# EAGLE board PAPR_PCB_v17 (EAGLE 9.7.0)
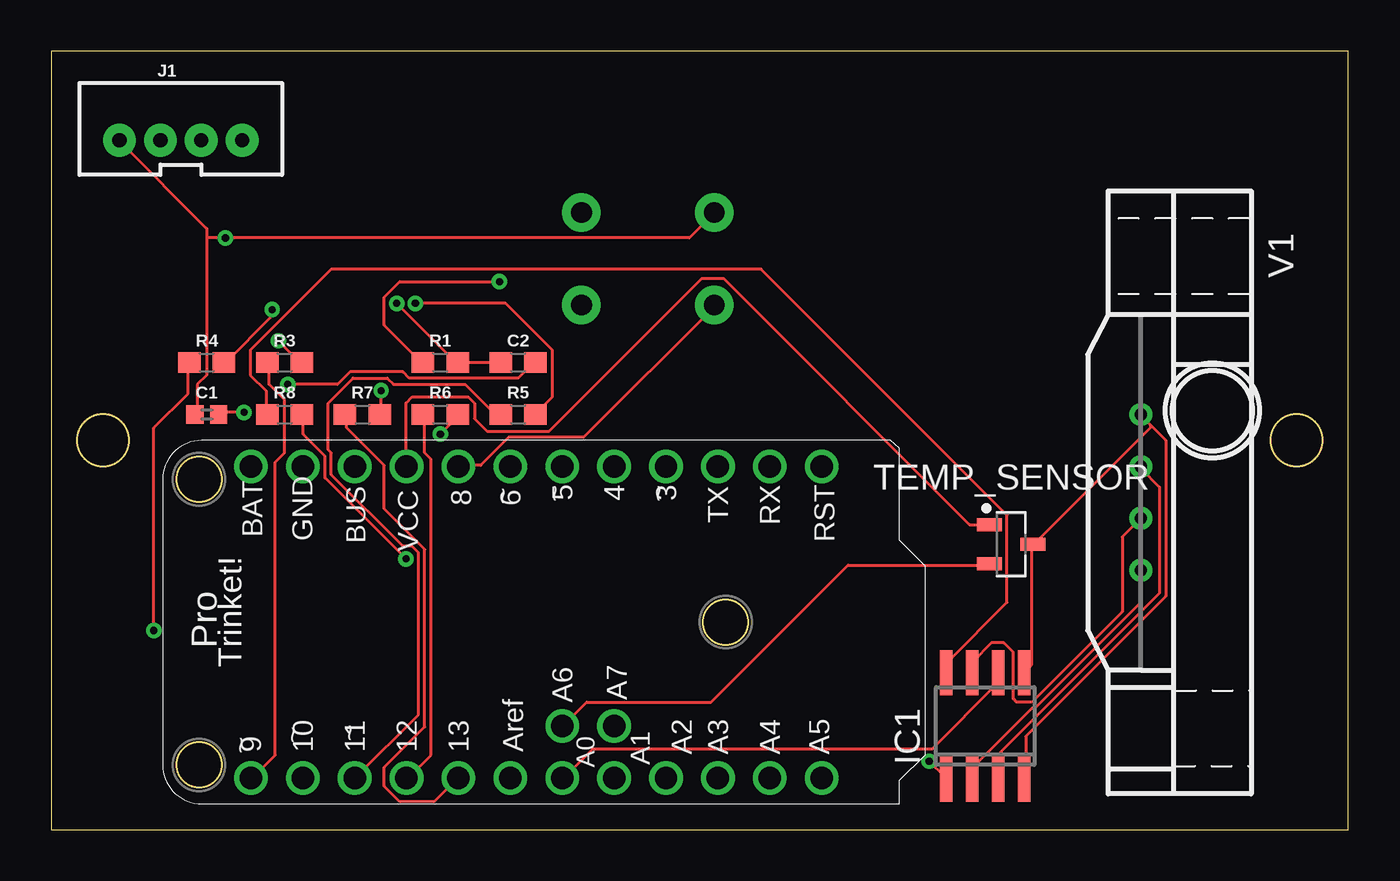
[diagram p0: board, top side]
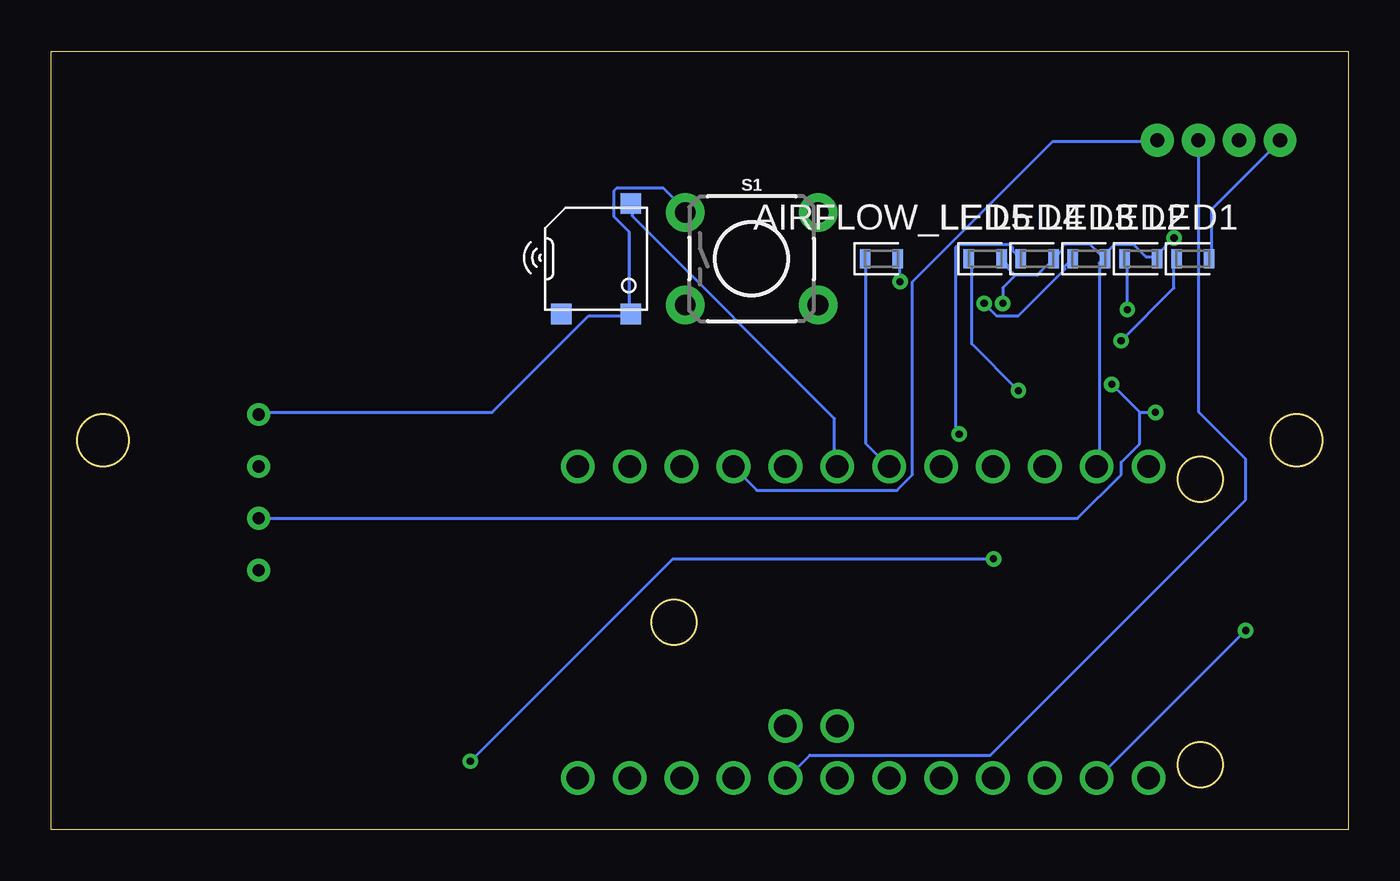
[diagram p1: board, bottom side, seen from below]

Size 63.5 x 38.1 mm. Coordinates in mm from the lower left corner, seen from the top.
Outline: 0,38.1 0,0 63.5,0 63.5,38.1 0,38.1
Outline: circle at 60.96,19.05 radius 1.27
Outline: circle at 2.54,19.05 radius 1.27
Outline: circle at 7.24,3.17 radius 1.1
Outline: circle at 7.24,17.14 radius 1.1
Outline: circle at 33.02,10.16 radius 1.1
Copper layers (1*16): Top 0.035mm / dielectric 1.5mm / Bottom 0.035mm
Design rules "default": minimum track width 6mil, minimum drill 0.35mm, track to track 6mil, track to pad 6mil, pad to pad 6mil, via to via 6mil, smd to smd 6mil, copper to edge 40mil, drill to drill 6mil, minimum pad ring 10mil, minimum via ring 8mil, stop-mask expansion 4mil, vias tented up to drill 0mil, thermal gap 10mil

## Footprints (pad centres in the part's own frame; a part is rotated, then mirrored left to right if it is on the bottom)
LEDC1608X39N_R = smd 0.512 x 0.912: 1 -0.8,0; 2 0.8,0
SMT-0540-S-R = smd 1 x 1: + 1.7,-2.7; - 1.7,2.7; M -1.7,-2.7
0402 = smd 0.85 x 0.9: 1 -0.58,0; 2 0.58,0
0603 = smd 1.1 x 1: 1 -0.85,0; 2 0.85,0
SO8 = smd 0.6 x 2.2: 1 -1.905,-2.6; 2 -0.635,-2.6; 3 0.635,-2.6; 4 1.905,-2.6; 5 1.905,2.6; 6 0.635,2.6; 7 -0.635,2.6; 8 -1.905,2.6
JST-4-PTH-VERT = drill 0.7 pad 1.6: 1 -3,-0.55; 2 -1,-0.55; 3 1,-0.55; 4 3,-0.55
LEDC1608X39N_G = smd 0.512 x 0.912: 1 -0.8,0; 2 0.8,0
TACTILE_SWITCH_PTH_6.0MM = drill 1.016 pad 1.88: 1 -3.251,2.261; 2 3.251,2.261; 3 -3.251,-2.261; 4 3.251,-2.261
SOT95P237X112-3N = smd 1.224 x 0.625: 1 -1.064,0.95; 2 -1.064,-0.95; 3 1.064,0
PROTRINKET = drill 1.1: 3 7.62,2.921; 4 7.62,5.461; 5 7.62,8.001; 6 7.62,10.541; 8 7.62,13.081; 9 -7.62,23.241; 10 -7.62,20.701; 11 -7.62,18.161; 12 -7.62,15.621; 13 -7.62,13.081; A0 -7.62,8.001; A1 -7.62,5.461; A2 -7.62,2.921; A3 -7.62,0.381; A4 -7.62,-2.159; A5 -7.62,-4.699; A6 -5.08,8.001; A7 -5.08,5.461; AREF -7.62,10.541; BAT+ 7.62,23.241; GND 7.62,20.701; RST 7.62,-4.699; RX 7.62,-2.159; TX 7.62,0.381; USB 7.62,18.161; VCC 7.62,15.621 | hole 2.2: -6.985,25.781; 6.985,25.781; 0,0
MPX2050GPV = drill 0.6: 1 -3.81,0; 2 -1.27,0; 3 1.27,0; 4 3.81,0

## Placement (x,y rotation side)
AIRFLOW_LED  LED_CHIP_RED-1608  [LEDC1608X39N_R]  22.86,27.94 0 bottom
ALERT_BUZZER  SMT-0540-S-R  [SMT-0540-S-R]  36.83,27.94 0 bottom
C1  0.1uF  [0402]  7.62,20.32 0 top
C2  10uF  [0603]  22.86,22.86 0 top
IC1  AD623R  [SO8]  45.72,5.08 0 top
J1  [JST-4-PTH-VERT]  6.35,34.29 0 top
LED1  LED_CHIP_RED-1608  [LEDC1608X39N_R]  7.62,27.94 0 bottom
LED2  LED_CHIP_RED-1608  [LEDC1608X39N_R]  10.16,27.94 0 bottom
LED3  LED_CHIP_GREEN-1608  [LEDC1608X39N_G]  12.7,27.94 0 bottom
LED4  LED_CHIP_GREEN-1608  [LEDC1608X39N_G]  15.24,27.94 0 bottom
LED5  LED_CHIP_GREEN-1608  [LEDC1608X39N_G]  17.78,27.94 0 bottom
R1  180  [0603]  19.05,22.86 0 top
R3  180  [0603]  11.43,22.86 0 top
R4  180  [0603]  7.62,22.86 0 top
R5  180  [0603]  22.86,20.32 0 top
R6  180  [0603]  19.05,20.32 0 top
R7  180  [0603]  15.24,20.32 0 top
R8  100  [0603]  11.43,20.32 0 top
S1  MOMENTARY-SWITCH-SPST-PTH-6.0MM  [TACTILE_SWITCH_PTH_6.0MM]  29.21,27.94 0 bottom
TEMP_SENSOR  MCP9700T-E/TTSOT-23  [SOT95P237X112-3N]  46.99,13.97 0 top
U$2  PRO_TRINKET  [PROTRINKET]  33.02,10.16 90 top
V1  MPX2050GPV  [MPX2050GPV]  53.34,16.51 270 top

## Library data of the parts
AIRFLOW_LED LED1 LED2 = Tutorial - Fusion 360; CATEGORY: Opto-Electronic; COLOR: Red; SUB-CATEGORY: LED
ALERT_BUZZER U$2 = adafruit
C1 = SparkFun-Capacitors; PROD_ID: CAP-12416
C2 = SparkFun-Capacitors; PROD_ID: CAP-11015
IC1 = analog-devices; MPN: AD623ARZ.; OC_FARNELL: 9426213; OC_NEWARK: 31M4186
J1 = SparkFun-Connectors; PROD_ID: CONN-13251
LED3-LED5 = Tutorial - Fusion 360; CATEGORY: Opto-Electronic; COLOR: Green; SUB-CATEGORY: LED
R1 R3-R7 = SparkFun-Resistors; PROD_ID: RES-08788
R8 = SparkFun-Resistors; PROD_ID: RES-12438
S1 = SparkFun-Switches; PROD_ID: SWCH-08441; SF_SKU: COM-00097
TEMP_SENSOR = Sensor; CATEGORY: Sensor; SUB-CATEGORY: Temperature
V1 = motorola-sensor-driver; MF: MOTOROLA; MPN: MPX2050GP; OC_FARNELL: 8814910; OC_NEWARK: 48F6767

## Nets
GND: ALERT_BUZZER.+ C1.1 C2.1 IC1.4 IC1.5 J1.1 LED1.2 LED2.2 LED3.2 LED4.2 LED5.2 R1.2 S1.1 TEMP_SENSOR.3 U$2.GND V1.1
N$1: AIRFLOW_LED.1 U$2.6
N$2: R7.1 U$2.13
N$3: AIRFLOW_LED.2 R1.1
N$4: S1.3 U$2.8
N$5: ALERT_BUZZER.- U$2.5
N$6: TEMP_SENSOR.1 U$2.VCC
N$7: LED1.1 R3.2
N$8: LED2.1 R4.2
N$9: LED3.1 R5.2
N$10: LED4.1 R6.2
N$11: LED5.1 R7.2
N$12: R3.1 U$2.9
N$13: R4.1 U$2.10
N$14: R5.1 U$2.11
N$15: R6.1 U$2.12
N$16: IC1.1 R8.2
N$17: IC1.8 R8.1
N$19: IC1.3 V1.2
N$20: IC1.2 V1.4
N$21: TEMP_SENSOR.2 U$2.A6
N$23: IC1.6 U$2.A0
N$24: U$2.BAT+
N$25: J1.3 U$2.A1
N$26: J1.4 U$2.3
N$28: J1.2
N$30: U$2.A2
USB: U$2.USB
VCC: C1.2 C2.2 IC1.7 V1.3

## Tracks (layer width: path | path; a pad name or v marks a point on that pad's centre or on a via)
GND  (via drill 0.35)
  Top 0.152: 7.62,28.96 7.62,29.41 3.35,33.68 J1.1 | 7.62,28.96 7.62,22.25 7.16,21.79 7.16,20.42 C1.1 | C2.1 R1.2 19.81,22.86 v16.92,25.76 | 7.62,28.96 v8.53,28.96 31.24,28.96 32.46,30.18 S1.1 | IC1.5 47.7,7.77 48.01,8.08 48.01,13.87 TEMP_SENSOR.3 48.16,14.02 53.8,19.66 53.8,19.81 | 53.8,19.81 53.34,20.27 V1.1 | 53.8,19.81 54.56,19.05 54.56,11.43 47.7,4.57 47.7,2.59 IC1.4
  Bottom 0.152: LED1.2 6.71,28.04 6.71,30.33 3.35,33.68 J1.1 | 9.45,28.04 9.91,28.04 10.52,28.65 11.43,28.65 12.04,28.04 | 12.04,28.04 12.65,28.65 13.87,28.65 14.02,28.5 14.02,28.35 14.33,28.04 LED4.2 14.48,27.89 15.24,27.13 16.31,27.13 | 12.04,28.04 LED3.2 12.04,27.89 12.19,27.74 12.19,17.83 U$2.GND | 16.31,27.13 16.61,27.43 16.61,27.58 16.92,27.89 LED5.2 | v16.92,25.76 16.92,26.52 16.31,27.13 | 9.45,28.04 v8.53,28.96 | 9.45,28.04 LED2.2 | S1.1 32.46,30.33 33.53,31.39 35.81,31.39 35.97,31.24 35.97,30.02 35.2,29.26 35.2,25.3 ALERT_BUZZER.+ 35.2,25.15 37.19,25.15 41.91,20.42 53.34,20.42 V1.1
N$1
  Bottom 0.152: AIRFLOW_LED.1 23.62,27.89 23.62,18.9 22.55,17.83 U$2.6
N$2
  Top 0.152: R7.1 14.48,20.27 14.48,19.66 16.31,17.83 16.31,15.7 18.29,13.72 18.29,5.03 16.31,3.05 16.31,2.13 17.07,1.37 18.75,1.37 19.81,2.44 U$2.13
N$3  (via drill 0.35)
  Top 0.152: v21.95,26.82 17.07,26.82 16.31,26.06 16.31,24.69 18.14,22.86 R1.1
  Bottom 0.152: v21.95,26.82 21.95,27.89 AIRFLOW_LED.2
N$4
  Top 0.152: U$2.8 19.96,17.83 21.03,17.83 22.4,19.2 26.06,19.2 32.46,25.6 S1.3
N$5
  Bottom 0.152: ALERT_BUZZER.- 35.05,30.63 35.05,30.02 25.15,20.12 25.15,17.83 U$2.5
N$6
  Top 0.152: TEMP_SENSOR.1 45.87,14.94 44.96,14.94 32.92,26.98 31.85,26.98 24.38,19.51 21.34,19.51 20.73,20.12 20.73,20.88 20.42,21.18 17.68,21.18 17.37,20.88 17.37,17.83 U$2.VCC
N$7  (via drill 0.35)
  Top 0.152: v11.12,23.93 12.19,22.86 R3.2
  Bottom 0.152: v11.12,23.93 8.53,26.52 8.53,27.89 LED1.1
N$8  (via drill 0.35)
  Top 0.152: v10.82,25.45 10.82,25.15 8.53,22.86 R4.2
  Bottom 0.152: v10.82,25.45 10.82,27.89 LED2.1
N$9  (via drill 0.35)
  Top 0.152: v17.83,25.76 22.25,25.76 24.54,23.47 24.54,21.18 23.77,20.42 R5.2
  Bottom 0.152: v17.83,25.76 17.22,25.15 16.15,25.15 13.87,27.43 13.87,27.58 13.56,27.89 LED3.1
N$10  (via drill 0.35)
  Top 0.152: v19.05,19.36 19.96,20.27 R6.2
  Bottom 0.152: v19.05,19.36 19.2,19.51 19.2,28.5 19.05,28.65 16.61,28.65 16.46,28.5 16.46,28.35 16.15,28.04 LED4.1
N$11  (via drill 0.35)
  Top 0.152: v16.15,21.49 16.15,20.42 R7.2
  Bottom 0.152: v16.15,21.49 18.44,23.77 18.44,27.89 LED5.1
N$12
  Top 0.152: R3.1 10.67,22.86 10.67,21.79 11.43,21.03 11.43,18.44 10.97,17.98 10.97,3.66 9.91,2.59 U$2.9
N$13  (via drill 0.35)
  Top 0.152: v5.03,9.75 5.03,19.66 6.71,21.34 6.71,22.86 R4.1
  Bottom 0.152: v5.03,9.75 12.19,2.59 U$2.10
N$14
  Top 0.152: R5.1 21.95,20.42 21.64,20.42 20.27,21.79 16.76,21.79 16.46,22.1 14.78,22.1 13.56,20.88 13.56,18.59 13.72,18.44 13.72,17.37 17.22,13.87 17.68,13.87 17.98,13.56 17.98,5.64 14.94,2.59 U$2.11
N$15
  Top 0.152: R6.1 18.29,20.27 18.29,18.44 18.59,18.14 18.59,3.66 17.53,2.59 U$2.12
N$16  (via drill 0.35)
  Top 0.152: v17.37,13.26 13.41,17.22 13.41,18.29 12.34,19.36 12.34,20.27 R8.2 | v42.98,3.35 43.74,2.59 IC1.1
  Bottom 0.152: v17.37,13.26 33.07,13.26 v42.98,3.35
N$17
  Top 0.152: R8.1 10.52,20.42 10.52,21.49 9.75,22.25 9.75,23.47 13.72,27.43 34.75,27.43 46.79,15.39 46.79,11.12 43.89,8.23 43.89,7.77 IC1.8
N$19
  Top 0.152: IC1.3 46.48,2.59 46.48,3.81 54.25,11.58 54.25,16.76 53.34,17.68 V1.2
N$20
  Top 0.152: V1.4 53.34,11.12 48.16,5.94 48.01,5.94 45.11,3.05 45.11,2.59 IC1.2
N$21
  Top 0.152: TEMP_SENSOR.2 45.87,12.95 39.01,12.95 32.31,6.25 26.21,6.25 25.15,5.18 U$2.A6
N$23
  Top 0.152: IC1.6 46.33,7.62 46.33,7.16 43.13,3.96 26.52,3.96 25.15,2.59 U$2.A0
N$25
  Bottom 0.152: J1.3 7.32,33.68 7.32,20.42 5.03,18.14 5.03,16.15 17.53,3.66 26.36,3.66 27.43,2.59 U$2.A1
N$26
  Bottom 0.152: J1.4 9.45,33.68 14.48,33.68 21.34,26.82 21.34,17.37 22.1,16.61 28.96,16.61 30.02,17.68 U$2.3
VCC  (via drill 0.35)
  Top 0.152: v9.45,20.42 8.23,20.42 C1.2 | v11.58,21.79 14.02,21.79 14.63,22.4 17.22,22.4 17.53,22.1 22.86,22.1 23.62,22.86 C2.2 | V1.3 52.43,14.33 52.43,10.67 48.01,6.25 47.24,6.25 47.09,6.4 47.09,8.69 46.63,9.14 46.02,9.14 45.11,8.23 45.11,7.77 IC1.7
  Bottom 0.152: 10.21,20.42 v9.45,20.42 | v11.58,21.79 10.21,20.42 | 10.21,20.42 10.21,18.9 11.12,17.98 11.12,17.37 13.26,15.24 V1.3